# Altium PCB PCB_Project_2.PcbDoc (part 2 of 2)
Units mm, origin at the board's own origin, x right, y up, seen from the top; angles counter-clockwise.
Board outline 50 x 50 mm, 2 copper layers (TOP, BOT), stack 0.273 mm thick; 59 components, 39 nets, 183 pads, 58 vias.
Unrouted connection lines stored in the file: 41.
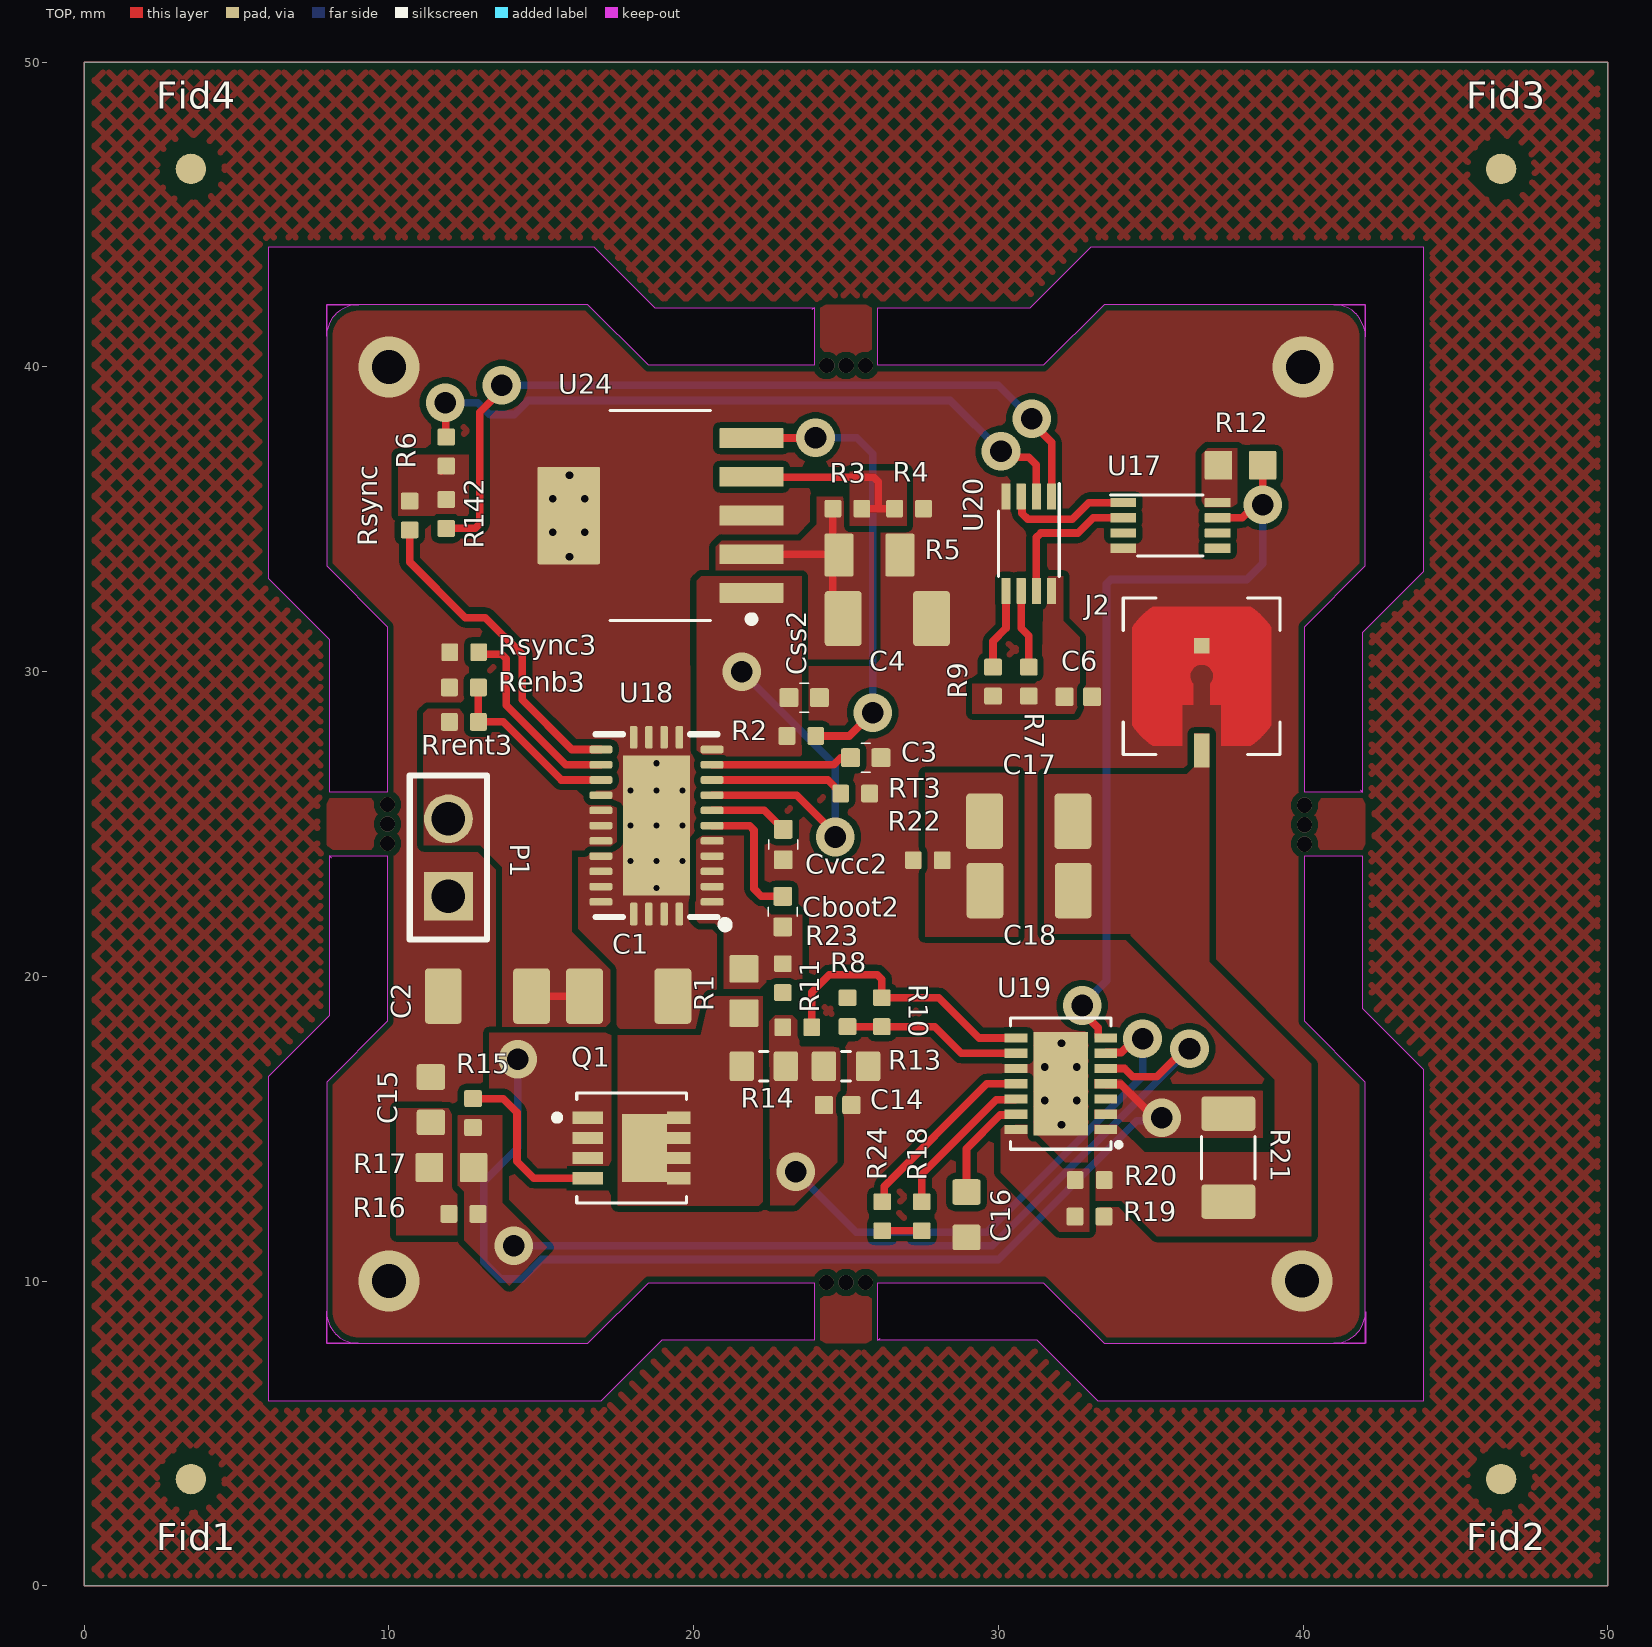
[diagram p0: TOP view]

## Polygon pours and split planes (outlines as drawn) (continued)
NetC6_2 on TOP "NONET_L-01_P-001" (solid, pour order 148): 31.49,33.129 32.125,33.129 32.125,31.668 32.666,31.128 32.666,28.625 29.151,28.625 29.151,29.603 31.199,29.603 31.432,29.836
NetR12_2 on TOP "NONET_L-01_P-001" (solid, pour order 149): 36.669,37.336 36.677,37.327 36.677,35.314 37.85,35.314 37.85,37.327
OUT_DCDC_+12V on TOP "NONET_L-01_P-001" (solid, pour order 150): 11.124,28.776 13.508,28.776 16.66,25.623 17.476,25.623 17.476,24.147 17.46,24.131 15.999,24.131 15.999,21.47 17.26,20.209 17.26,18.164 13.877,18.164 13.723,18.318 13.723,23.577 13,24.3 11.139,24.3
NetC14_2 on TOP "NONET_L-01_P-001" (solid, pour order 154): 22.484,18.733 22.493,18.724 23.473,18.724 23.473,17.753 23.536,17.69 24.814,17.69 24.814,16.062 24.715,15.963 24.715,13.904 23.303,12.492 22.52,12.492
NetR19_2 on TOP "NONET_L-01_P-001" (solid, pour order 160): 30.071,15.174 31.09,15.174 31.09,14.702 32.114,13.678 32.987,13.678 32.987,11.629 32.994,11.623 31.994,11.623 30.071,13.546
NetQ1_1 on TOP "NONET_L-01_P-001" (solid, pour order 163): 33.03,16.674 33.03,15.224 34.301,15.224 34.825,14.7 38.675,14.7 38.675,16.225 38.699,16.249 34.412,16.249 33.988,16.673
OCXO_+5V7 on TOP "NONET_L-01_P-001" (solid, pour order 164): 33.15,15.124 33.149,12.641 33.214,12.641 34.038,12.641 35.206,11.473 40.273,11.473 40.275,11.475 40.275,17.125 36.926,20.474 36.926,27.959 36.93,27.962 36.917,27.975 36.433,27.975 36.433,26.881 36.177,26.625 31.5,26.625 31.5,21.4 34.35,21.4 34.35,21.325 39.075,16.6 39.075,14.225 34.799,14.225 33.898,15.125 33.897,15.124
NetC17_1 on TOP "NONET_L-01_P-001" (solid, pour order 166): 27.6,26.675 27.6,21.3 30.65,21.3 30.65,26.675
+5V_AUX on TOP "NONET_L-01_P-001" (solid, pour order 167): 20.713,34.303 20.724,34.292 20.724,33.133 23.539,33.133 23.561,33.111 23.561,30.406 25.835,30.406 25.912,30.483 25.912,34.756 24.908,35.76 24.885,35.738 24.035,35.738 24.035,34.833 23.494,34.292
no net on TOP "NONET_L-01_P-001" (hatched 45Degree grid 0.508 track 0.203, shelved, pour order 124): 0,50 0,0 50,0 50,50

## Other copper
BOT:
  pour cut-out: 6.05,43.95 16.724,43.95 18.724,41.95 31.052,41.95 33.052,43.95 43.95,43.95 43.952,33.276 41.95,31.275 41.95,18.955 43.952,16.953 43.952,6.056 33.292,6.042 31.281,8.037 18.963,8.063 16.921,6.021 6.05,6.05 6.05,16.77 8.003,18.724 8.003,31.049 6.05,33.002

## Silkscreen, mask and mechanical layers (free items; w line width, h text height)
M1 Board Outline:
  lines w0.1: 0.008,-0.008 cw(c0.008,0) 0,0 ; 8,10 18.5,10 ; 8,24 10,24 ; 8,40 18.5,40 ; 8,41 10,41 ; 8,41 cw(c9,41) 9,42 ; 9,10 9,8 ; 9.009,40 9,40.009 9,42 ; 9.983,40.998 10,41.015 ; 10,8 10,18.5 ; 10,9 8,9 ; 10,25 40,25 ; 10,42 10,31.5 ; 24,8 24,10 ; 25,10 25,40 ; 26,8 26,10 ; 26,40 26,42 ; 40,8 40,18.5 ; 40,9 42,9 ; 40,24 42,24 ; 40,26 42,26 ; 40,41 42,41 ; 40,42 40,31.5 ; 41,8 33.5,8 31.5,10 ; 41,10 41,8 ccw(c41,9) 42,9 ; 41,40.009 41,42 ; 42,10 31.5,10 ; 42,40 31.5,40 ; 0,0 50,0 50,50 0,50 0,0 ; 0,0 0,0 ; 0,0 0,0 ; 6,33.025 6,44 ; 6,33.025 8,31.025 ; 6,33.025 6,44 ; 6,33.025 8,31.025 ; 6,44 16.75,44 ; 6,44 16.75,44 ; 8,9 ccw(c9,9) 9,8 ; 8,9 8,16.5 10,18.5 ; 8,26 8,31.025 ; 8,26 10,26 ; 8,26 10,26 ; 8,31.025 8,18.75 6,16.75 6,6 17,6 19,8 31.275,8 33.275,6 44,6 44,16.775 42.025,18.75 42.025,31.25 44,33.225 44,44 33.125,44 31.125,42 18.75,42 ; 8,33.5 8,41 8,33.5 ; 8,33.5 10,31.5 ; 8,33.5 10,31.5 ; 9,8 16.5,8 18.5,10 ; 9,42 16.5,42 ; 9,42 16.5,42 ; 10,18.5 10,31.5 ; 10,26 10,31.5 ; 16.5,42 18.5,40 ; 16.5,42 18.5,40 ; 16.75,44 18.75,42 ; 16.75,44 18.75,42 ; 18.5,10 31.5,10 ; 18.5,40 24,40 ; 18.5,40 31.5,40 ; 18.75,42 24,42 ; 24,40 24,42 ; 24,40 24,42 ; 31.5,40 33.5,42 41,42 ; 40,18.5 42,16.5 42,9 ; 40,18.5 40,31.5 ; 40,31.5 42,33.5 42,41 ; 41,42 cw(c41,41) 42,41
M9 Title Sheet:
  drawing of 46 lines, arcs and shapes, not listed
  text "1" at -61.729,193.316 h1.78
  text "2" at 2.915,193.316 h1.78
  text "3" at 68.067,193.316 h1.78
  text "4" at 132.965,193.316 h1.78
  text "5" at 197.99,193.316 h1.78
  text "6" at 263.015,193.316 h1.78
  text "A" at -92.07,170.304 h1.78
  text "A" at 288.93,170.304 h1.78
  text "B" at -92.07,122.247 h1.78
  text "B" at 288.93,122.247 h1.78
  text "C" at -92.07,73.733 h1.78
  text "C" at 288.93,73.733 h1.78
  text "D" at -92.07,25.727 h1.78
  text "D" at 288.93,25.727 h1.78
  text "E" at -92.07,-22.787 h1.78
  text "E" at 288.93,-22.787 h1.78
  text "F" at -92.07,-71.047 h1.78
  text "F" at 288.93,-71.047 h1.78
  text "Advanced Technology Applications" at 233.525,-72.025 h1.5
  text ".PRJ_Title" at 256.6,-77.075 h1.5
  text "PROJECT TITLE:" at 234.775,-77.275 h1.5
  text "DESIGNED FOR:" at 234.775,-82.275 h1.5
  text ".PRJ_Customer" at 254.409,-82.275 h1.5
  text "Size" at 233.525,-86.275 h1.5
  text ".print_Scale" at 242.975,-86.275 h1.5
  text ".Print_Date" at 260.275,-86.275 h1.5
  text "REV." at 277.575,-86.275 h1.5
  text "A4" at 233.525,-90.275 h2
  text "ENGINEER:" at 242.975,-90.275 h1.5
  text ".PRJ_Engineer" at 258.025,-90.275 h1.5
  text ".PCB_Rev" at 277.575,-90.275 h1.5
  text "1" at -61.729,-93.704 h1.78
  text "2" at 2.915,-93.704 h1.78
  text "3" at 68.067,-93.704 h1.78
  text "4" at 132.965,-93.704 h1.78
  text "5" at 197.99,-93.704 h1.78
  text "6" at 263.015,-93.704 h1.78
M17 Drawing Layer:
  pour cut-out: 6.05,43.95 16.724,43.95 17.724,42.95 18.724,41.95 31.05,41.95 32.085,42.983 33.05,43.95 43.951,43.95 43.951,33.275 41.95,31.275 41.95,18.958 43.951,16.95 43.948,6.056 33.289,6.041 31.27,8.051 18.96,8.048 16.916,6.033 6.051,6.051 6.05,16.723 8.05,18.73 8.05,31.048 6.051,32.994

## Dimensions
42.05,7.95 to 42.05,42.05 on M2 Board Dimensions
7.95,7.975 to 42.05,7.95 on M2 Board Dimensions
0,0 to 0,50 on M2 Board Dimensions
0,50 to 50,50 on M2 Board Dimensions